# Altium PCB ice_MotherBoard.PcbDoc
Units mm, origin at the board's own origin, x right, y up, seen from the top; angles counter-clockwise.
Board outline 65.6 x 41.6 mm, 2 copper layers (Top Layer, Bottom Layer), stack 1.569 mm thick; 46 components, 33 nets, 271 pads, 43 vias.
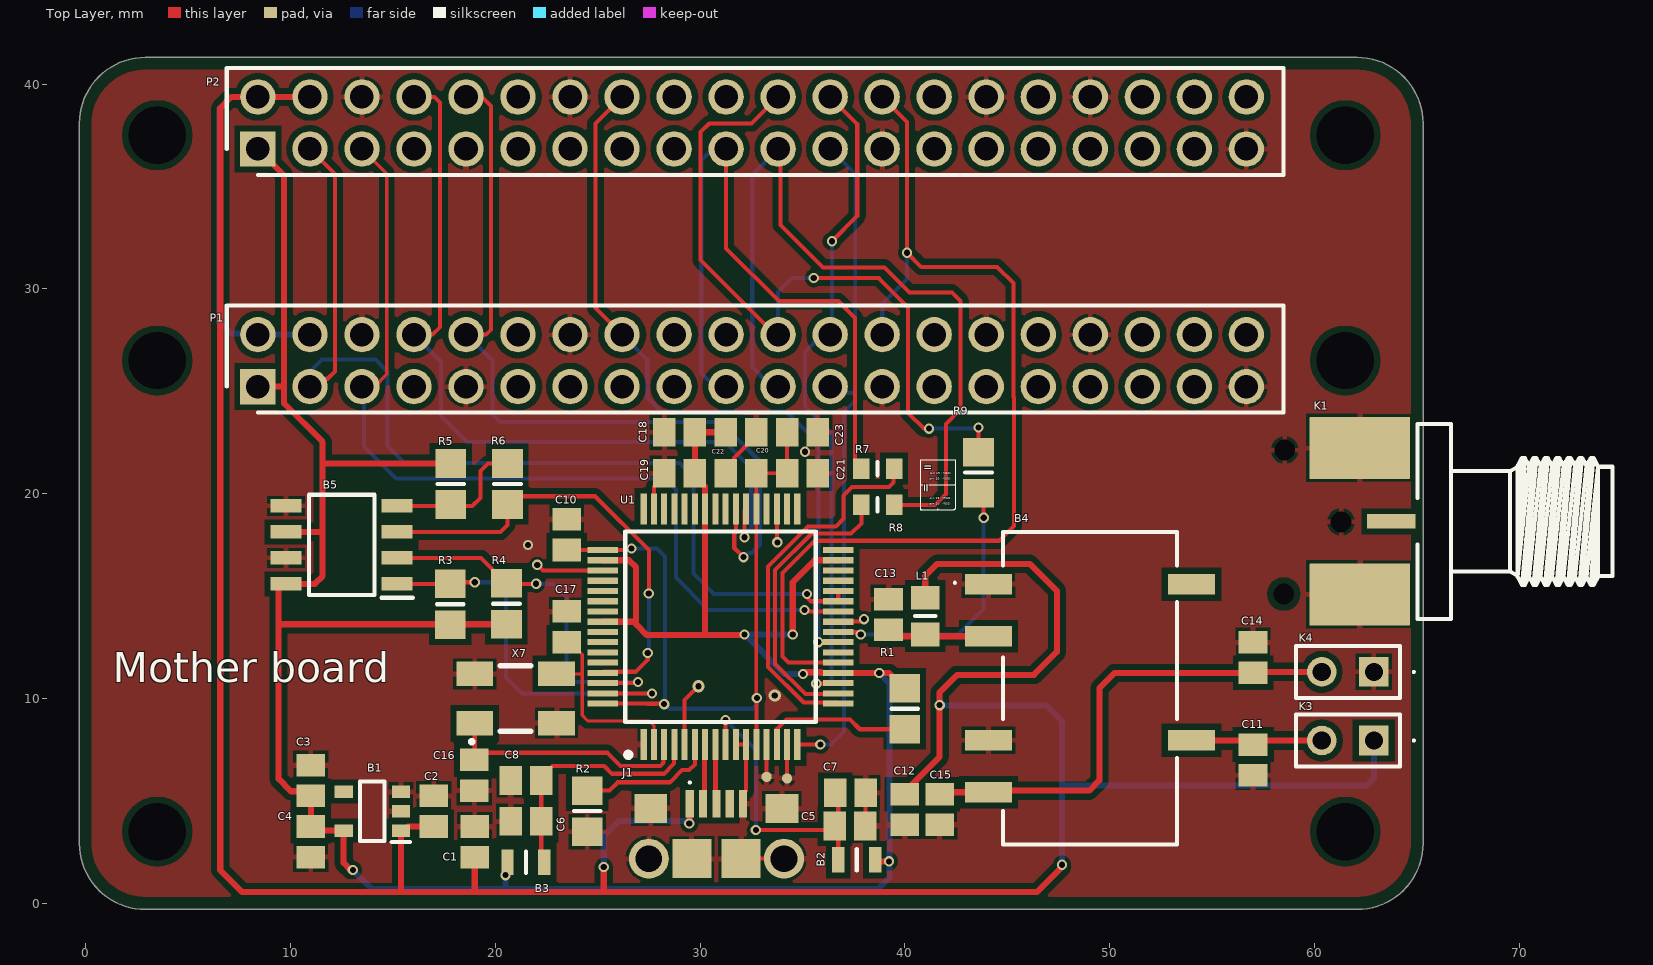
[diagram p0: Top Layer view]
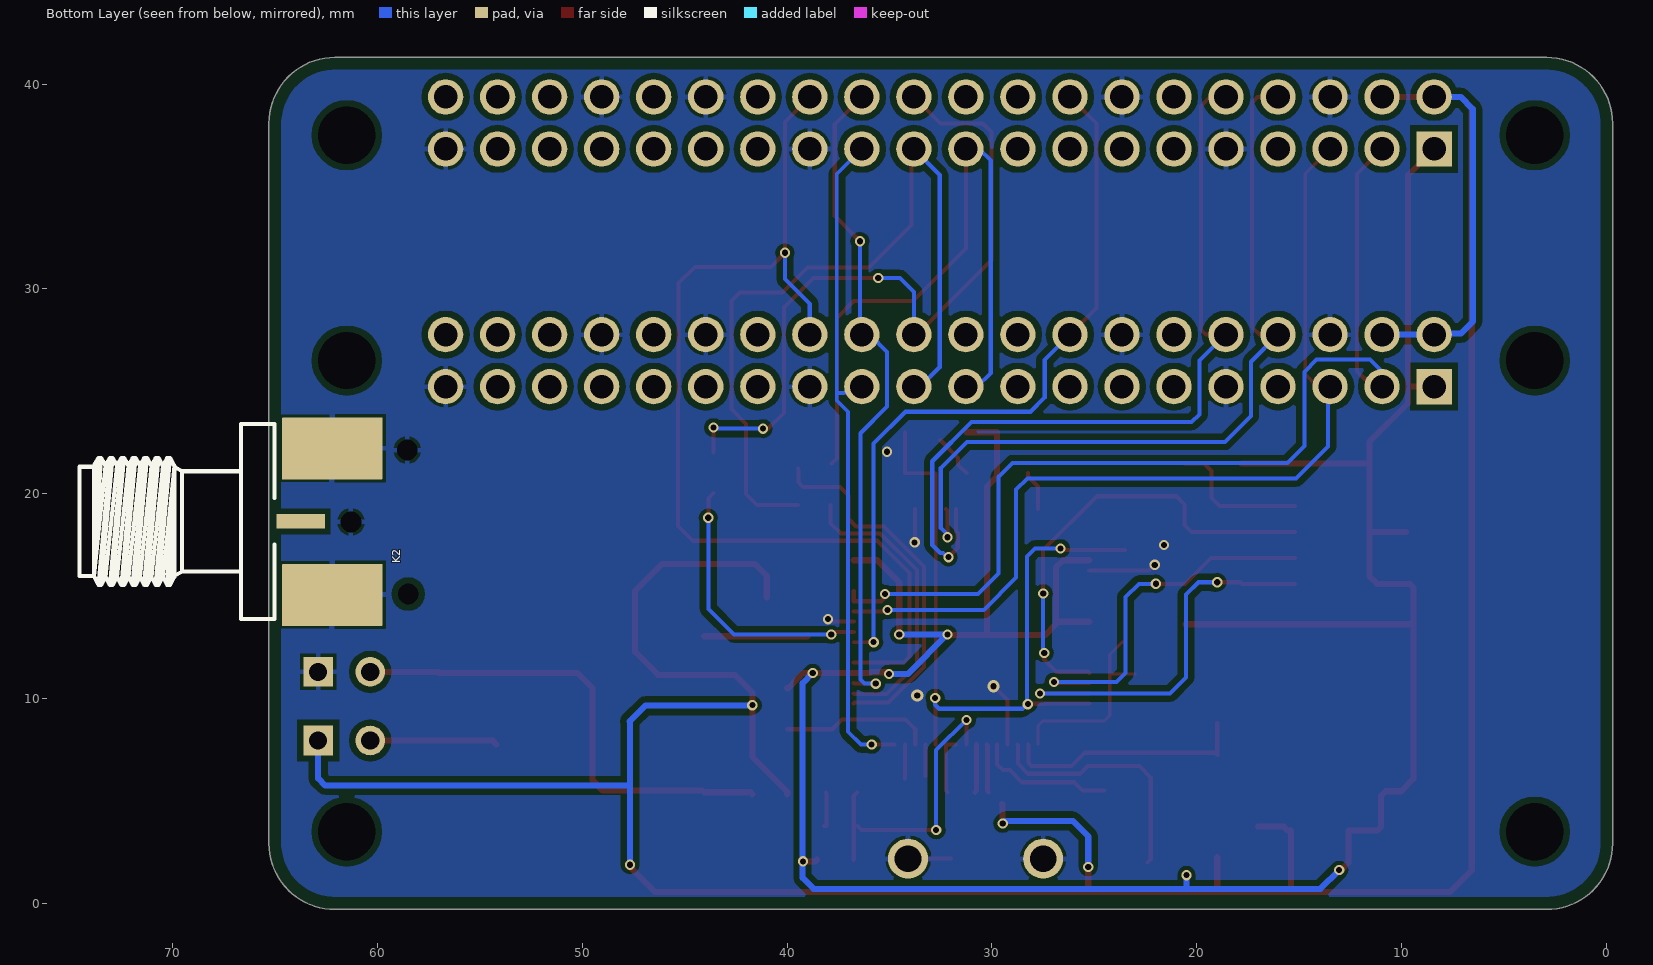
[diagram p1: Bottom Layer view, seen from below]

## Layer stack, top to bottom
Top Solder: solder mask 0.0254, SM-001, Dk 4
Top Layer: signal copper 0.035
Dielectric 1: core 1.4986, Core-043, Dk 4.3
Bottom Layer: signal copper 0.035
Bottom Solder: solder mask 0.0254, SM-001, Dk 4

## Board outline
0.644,0.644 ccw(c0.752,0.748) 0.646,0.642 ccw(c2.92,2.916) 2.92,-0.3 62.08,-0.3 ccw(c62.08,2.916) 64.354,0.642 ccw(c64.248,0.748) 64.356,0.644 ccw(c64.252,0.752) 64.358,0.646 ccw(c62.084,2.92) 65.3,2.92 65.3,38.08 ccw(c62.084,38.08) 64.358,40.354 ccw(c64.252,40.248) 64.356,40.356 ccw(c64.248,40.252) 64.354,40.358 64.358,40.354 64.354,40.358 ccw(c62.08,38.084) 62.08,41.3 2.92,41.3 ccw(c2.92,38.084) 0.646,40.358 0.642,40.354 cw(c0.748,40.248) 0.644,40.356 cw(c0.752,40.252) 0.646,40.358 0.642,40.354 ccw(c2.916,38.08) -0.3,38.08 -0.3,2.92 ccw(c2.916,2.92) 0.642,0.646 0.646,0.642 0.644,0.644 cw(c0.748,0.752)

## Design rules (kind name [scope] priority, off if disabled: settings)
BoardOutlineClearance [All] p1: gap=0.2 ignorepadtopadclearanceinfootprint=FALSE except(0.6: Poly-OutlineEdge)
Clearance Clearance_HV [InNet('+HV', '-HV')] p1: gap=0.6 ignorepadtopadclearanceinfootprint=TRUE
Clearance "Clearance Polygons" [InPolygon] p2: gap=0 ignorepadtopadclearanceinfootprint=FALSE except(0.2: Via-Fill Via-Poly Via-Region Fill-Fill Fill-Poly Fill-Region Poly-Poly Poly-Region Region-Region; 0.3: Arc-Fill Arc-Poly Arc-Region Track-Fill Track-Poly Track-Region SMDPad-Fill SMDPad-Poly SMDPad-Region THPad-Fill THPad-Poly THPad-Region)
Clearance [All] p3: gap=0.254 ignorepadtopadclearanceinfootprint=FALSE except(0.1: Arc-Text Track-Text SMDPad-Text THPad-Text Via-Text Fill-Text Poly-Text Region-Text Text-Text; 0.152: Arc-Arc Arc-Track Arc-SMDPad Arc-Via Track-Track Track-SMDPad Track-Via SMDPad-SMDPad SMDPad-Via; 0.2: Via-Fill Via-Poly Via-Region Fill-Fill Fill-Poly Fill-Region Poly-Poly Poly-Region Region-Region; 0.54: THPad-THPad)
ComponentClearance "HM-TRP & UFL" [InComponent('X1') vs InComponent('U1')] p1: gap=0 collisioncheckmode=3 verticalgap=0 showdistances=FALSE
ComponentClearance [All] p2: gap=0.025 collisioncheckmode=3 verticalgap=0.025 showdistances=FALSE
DiffPairsRouting [All] p1: maxlimit=0.254 minlimit=0.1 mostfreqgap=0.2 toplayer_minwidth=0.2 toplayer_maxwidth=0.381 toplayer_prefwidth=0.25 bottomlayer_minwidth=0.2 bottomlayer_maxwidth=0.381 bottomlayer_prefwidth=0.25 maxuncoupledlength=12.7
Height [All] p1: minheight=0 maxheight=60 prefheight=12.7
HoleSize [All] p1: absolutevalues=TRUE maxlimit=6.3 minlimit=0.2 maxpercent=80.000 minpercent=20.000
HoleToHoleClearance [All] p1: gap=0.3 allowstackedmicrovias=FALSE
MinimumAnnularRing MinimumAnnularRing_Via [IsVia] p1: minimumring=0.1
MinimumAnnularRing [All] p2: minimumring=0.1
MinimumSolderMaskSliver [All] p1: minsoldermaskwidth=0
PlaneClearance [All] p1: clearance=0.254
PlaneConnect [All] p1: planeconnectstyle=Relief reliefexpansion=0.102 reliefentries=4 reliefconductorwidth=0.152 reliefairgap=0.152
PolygonConnect "Via connect style" [isVia] p1: connectstyle=Direct reliefconductorwidth=0.254 reliefentries=4 polygonreliefangle="90 Angle" airgapwidth=0.254
PolygonConnect [All] p2: connectstyle=Relief reliefconductorwidth=0.254 reliefentries=4 polygonreliefangle="90 Angle" airgapwidth=0.152
RoutingCorners [All] p1: cornerstyle=45-Degree minsetback=1.25 maxsetback=1.25
RoutingVias [All] p1: holewidth=0.4 width=0.8 viastyle="Through Hole" minholewidth=0.2 minwidth=0.45 maxholewidth=2 maxwidth=4
SilkToSilkClearance [All] p1: silktosilkclearance=0
SilkToSolderMaskClearance [IsPad] p1: minsilkscreentomaskgap=0.1 clearancetoexposedcopper=TRUE
SolderMaskExpansion SolderMaskExpansion_Via [IsVia] p1: expansion=0.05
SolderMaskExpansion [All] p2: expansion=0.05 useseparateexpansions=TRUE expansionbottom=0.05
UnRoutedNet [All] p1: checkbadconnections=TRUE
Width 50Ohm [InNetClass('50Ohm')] p1 off: maxlimit=0.185 minlimit=0.185 preferedwidth=0.185 impedanceprofiledriven=TRUE minimp=50.000000 maximp=50.000000 favimp=50.000000
Width GND [InNet('GND')] p2: maxlimit=6.35 minlimit=0.127 preferedwidth=0.508
Width [All] p3: maxlimit=10.16 minlimit=0.152 preferedwidth=0.203
18 further rules are at their usual default settings.

## Classes and differential pairs
differential pair D: +D_P -D_N

## Components (designator, comment, footprint, x,y, rotation, side; value= is the part's Value field where it differs from the comment)
B1 "BU33SD5WG-TR" SOT95P280X125-5N_ 14,4.5 r180 top
B2 "BLM21AG102SN1D" BLM21AG102BH1J 37.65,2.125 r180 top
B3 "BLM21AG102SN1D" BLM21AG102BH1J 21.5,2 r0 top
B4 "IAS0105D24" IAS0105D15_ 49.041,10.5 r270 top
B5 "M93C46-WMN6P" SOIC127P600X175-8N 12.5,17.5 r180 top
C1 "0.1uF 10V" C0805 19,3 r270 top
C2 "1uF  6.3 VDC" C0805 17,4.5 r270 top
C3 "1uF  6.3 VDC" C0805 11,6 r270 top
C4 "0.1uF 10V" C0805 11,3 r90 top
C5 "4.7uF 25V" C0805 37.325,3.775 r180 top
C6 "4.7uF 25V" C0805 21.5,4 r0 top
C7 "0.1uF 10V" C0805 37.35,5.4 r180 top
C8 "0.1uF 10V" C0805 21.5,6 r0 top
C10 "3.3V 25V" C0805 23.5,18 r270 top
C11 "1uF 50V" C0805 57,7 r90 top
C12 "4.7uF 25V" C0805 39.998,4.575 r90 top
C13 "4.7uF 25V" C0805 39.2,14.1 r270 top
C14 "1uF 50V" C0805 57,12 r90 top
C15 "1nF 25V" C0805 41.702,4.575 r90 top
C16 "22pF 50V" C0805 18.975,6.25 r90 top
C17 "22pF 50V" C0805 23.5,13.5 r270 top
C18 "0.1uF 10V" C0805 29,23 r0 top
C19 "0.1uF 10V" C0805 29,21 r0 top
C20 "0.1uF 10V" C0805 32,23 r180 top
C21 "0.1uF 10V" C0805 35,21 r180 top
C22 "0.1uF 10V" C0805 32,21 r0 top
C23 "0.1uF 10V" C0805 35,23 r180 top
J1 "10118193-0001LF" 101181930001LF 30.8,2.25 r0 top (schematic designator J?)
K1 "SMA_Edge" AMPHENOL_132357-11_ 63.75,18.65 r180 top
K2 "SMA_Edge" AMPHENOL_132357-11_ 63.75,18.65 r180 bottom
K3 "1x2PLS" 55342061_ 62.9,7.95 r90 top
K4 "1x2PLS" 55342061_ 62.9,11.3 r90 top
L1 "6.8uH" INDC2012X110N_ 41,14.025 r270 top
P1 "2x20 2.54mm vertical" RHDR40W97P254X254_2X20_5130X508X860P_ 32.545,26.495 r0 top
P2 "2x20 2.54mm vertical" RHDR40W97P254X254_2X20_5130X508X860P_ 32.545,38.1 r0 top
R1 "1K" 6-0805_M 40,9.5 r270 top
R2 "12K" 6-0805_M 24.5,4.5 r90 top
R3 "10K" 6-0805_M 17.8,14.6 r270 top
R4 "10K" 6-0805_M 20.55,14.625 r90 top
R5 "10K" 6-0805_M 17.825,20.475 r270 top
R6 "2.2K" 6-0805_M 20.6,20.475 r270 top
R7 "0R" 0603-R 38.675,21.225 r180 top
R8 "0R" 0603-R 38.675,19.45 r0 top
R9 "2.2K" 6-0805_M 43.6,21.025 r90 top
U1 "FT4232HL-TRAY" QFP50P1200X1200X160-64N 31,13.5 r90 top
X7 "ABM3B-12.000MHZ-22-D3W-T" ABM3B 21,10 r0 top

## Footprints (in the part's own frame and the unit in brackets; to place one, negate y for a bottom-side part, rotate by r counter-clockwise, add the part's x,y. Pads: shape width x height; smd on the part's side, far side on the other; paste and mask are expansions set on the pad)
6-0805_M [mm] "Chip Resistor, Body 2.0x1.2mm, IPC Low Density"
  rect 1.4x1.5 smd: 1(-1,0) 2(1,0)
  silkscreen extent 0,-0.65 0,0.65, body extent -1.07,-0.7 1.07,0.7, height 0.7
0603-R [mm]
  rect 0.8x1 smd: 1(-0.8,0) 2(0.8,0)
  silkscreen extent 0,-0.33 0,0.33, body extent -0.77,-0.42 0.78,0.43, height 0.45
55342061_ [mm]
  rect 1.446x1.446 hole 0.89: 1(0,0)
  round 1.446 hole 0.89: 2(0,2.54)
  silkscreen extent -1.27,-2 1.27,3.81, body extent -1.27,-1.24 1.27,3.78, height 8.58
101181930001LF [mm]
  rect 0.4x1.35 smd: 1(-1.3,2.605) 2(-0.65,2.605) 3(0,2.605) 4(0.65,2.605) 5(1.3,2.605)
  round 1.95 hole 1.3: MH1(-3.3,-0.07) MH2(3.3,-0.07)
  rect 1.6x1.4 smd: MP1(-3.2,2.38) MP2(3.2,2.38)
  rect 1.9x1.9 smd: MP3(-1.2,-0.07) MP4(1.2,-0.07)
  silkscreen extent -1.35,3.6 -1.25,3.7, body extent -4.1,-2.73 3.76,2.93, height 2.81
ABM3B [mm]
  rect 1.8x1.2 smd: 1(-2,-1.2) 2(2,-1.2) 3(2,1.2) 4(-2,1.2)
  silkscreen extent -2.2,-2.16 0.75,1.6, body extent -2.5,-1.6 2.5,1.6, height 1.1
AMPHENOL_132357-11_ [mm]
  rect 2.35x0.7 smd: 1(0,0)
  rect 4.9x3 smd: 2(1.525,3.55) 2(1.525,-3.6)
  rect 4.9x3 smd far side: 2(1.55,3.575) 2(1.55,-3.575)
  silkscreen extent -10.81,-4.76 -1.28,4.76, body extent -10.8,-4.76 3.48,4.76, height 4.08
BLM21AG102BH1J [mm]
  rect 0.6x1.25 smd: 1(-0.9,0) 2(0.9,0)
  silkscreen extent 0,-0.53 0,0.53, body extent -0.98,-0.43 1.02,0.43, height 0.63
C0805 [mm] "Chip Capacitor, Body 2.0x1.3mm, IPC High Density"
  rect 1.1x1.4 smd: 1(-0.75,0) 2(0.75,0)
  body extent -1.1,-0.72 1.1,0.72, height 1.4
IAS0105D15_ [mm]
  rect 1x2.29 smd: 1(-5.08,-4.955) 2(-2.54,-4.955) 4(2.54,-4.955) 5(5.08,-4.955) 7(2.54,4.955) 10(-5.08,4.955)
  silkscreen extent -7.62,-6.65 7.62,4.25, body extent -7.62,-6 7.62,6, height 7.85
INDC2012X110N_ [mm]
  rect 1.15x1.4 smd: 1(-0.9,0) 2(0.9,0)
  silkscreen extent 0,-0.5 0,0.5, body extent -1,-0.6 1,0.6, height 1.1
QFP50P1200X1200X160-64N [mm]
  rect 1.5x0.3 smd: 1(-5.75,3.75) 2(-5.75,3.25) 3(-5.75,2.75) 4(-5.75,2.25) 5(-5.75,1.75) 6(-5.75,1.25) 7(-5.75,0.75) 8(-5.75,0.25) 9(-5.75,-0.25) 10(-5.75,-0.75) 11(-5.75,-1.25) 12(-5.75,-1.75) 13(-5.75,-2.25) 14(-5.75,-2.75) 15(-5.75,-3.25) 16(-5.75,-3.75) 33(5.75,-3.75) 34(5.75,-3.25) 35(5.75,-2.75) 36(5.75,-2.25) 37(5.75,-1.75) 38(5.75,-1.25) 39(5.75,-0.75) 40(5.75,-0.25) 41(5.75,0.25) 42(5.75,0.75) 43(5.75,1.25) 44(5.75,1.75) 45(5.75,2.25) 46(5.75,2.75) 47(5.75,3.25) 48(5.75,3.75)
  rect 0.3x1.5 smd: 17(-3.75,-5.75) 18(-3.25,-5.75) 19(-2.75,-5.75) 20(-2.25,-5.75) 21(-1.75,-5.75) 22(-1.25,-5.75) 23(-0.75,-5.75) 24(-0.25,-5.75) 25(0.25,-5.75) 26(0.75,-5.75) 27(1.25,-5.75) 28(1.75,-5.75) 29(2.25,-5.75) 30(2.75,-5.75) 31(3.25,-5.75) 32(3.75,-5.75) 49(3.75,5.75) 50(3.25,5.75) 51(2.75,5.75) 52(2.25,5.75) 53(1.75,5.75) 54(1.25,5.75) 55(0.75,5.75) 56(0.25,5.75) 57(-0.25,5.75) 58(-0.75,5.75) 59(-1.25,5.75) 60(-1.75,5.75) 61(-2.25,5.75) 62(-2.75,5.75) 63(-3.25,5.75) 64(-3.75,5.75)
  silkscreen extent -6.37,-4.65 4.65,4.65, body extent -6,-6 6,6, height 1.6
RHDR40W97P254X254_2X20_5130X508X860P_ [mm]
  rect 1.725x1.725 hole 1.15: 1(-24.13,-1.27)
  round 1.725 hole 1.15: 2(-24.13,1.27) 3(-21.59,-1.27) 4(-21.59,1.27) 5(-19.05,-1.27) 6(-19.05,1.27) 7(-16.51,-1.27) 8(-16.51,1.27) 9(-13.97,-1.27) 10(-13.97,1.27) 11(-11.43,-1.27) 12(-11.43,1.27) 13(-8.89,-1.27) 14(-8.89,1.27) 15(-6.35,-1.27) 16(-6.35,1.27) 17(-3.81,-1.27) 18(-3.81,1.27) 19(-1.27,-1.27) 20(-1.27,1.27) 21(1.27,-1.27) 22(1.27,1.27) 23(3.81,-1.27) 24(3.81,1.27) 25(6.35,-1.27) 26(6.35,1.27) 27(8.89,-1.27) 28(8.89,1.27) 29(11.43,-1.27) 30(11.43,1.27) 31(13.97,-1.27) 32(13.97,1.27) 33(16.51,-1.27) 34(16.51,1.27) 35(19.05,-1.27) 36(19.05,1.27) 37(21.59,-1.27) 38(21.59,1.27) 39(24.13,-1.27) 40(24.13,1.27)
  silkscreen extent -25.65,-2.54 25.95,2.69, body extent -25.65,-2.54 25.65,2.54, height 8.6
SOIC127P600X175-8N [mm]
  rect 1.525x0.65 smd: 1(-2.712,1.905) 2(-2.712,0.635) 3(-2.712,-0.635) 4(-2.712,-1.905) 5(2.712,-1.905) 6(2.712,-0.635) 7(2.712,0.635) 8(2.712,1.905)
  silkscreen extent -3.47,-2.45 1.6,2.58, body extent -3,-2.45 3,2.45, height 1.75
SOT95P280X125-5N_ [mm]
  rect 0.9x0.6 smd: 1(-1.4,0.95) 2(-1.4,0) 3(-1.4,-0.95) 4(1.4,-0.95) 5(1.4,0.95)
  silkscreen extent -1.85,-1.45 0.6,1.5, body extent -1.4,-1.45 1.4,1.45, height 1.25

## Part data
B1: "LDO regulator,3.3V,0.5A,standby,SSOP5 ROHM BU33SD5WG-TR, LDO Voltage Regulator, 0.5A, 3.3 V +/-2%, 1.7  6 Vin, 5-Pin SSOP", Manufacturer_Name="ROHM Semiconductor", Mouser Part Number=755-BU33SD5WG-TR, Datasheet Link=https://componentsearchengine.com/Datasheets/1/BU33SD5WG-TR.pdf, Geometry.Height=1.25mm, Manufacturer_Part_Number=BU33SD5WG-TR, Mouser Price/Stock=https://www.mouser.co.uk/ProductDetail/ROHM-Semiconductor/BU33SD5WG-TR?qs=%2FKR40Cd6GUrQDzRkUEt69Q%3D%3D
B2 B3: "BLM21_N1D Series EMI Suppression Filter 1000+/-25% at 100MHz 600mA @85", Manufacturer_Name="Murata Electronics", Mouser Part Number=81-BLM21AG102SN1, Arrow Part Number=BLM21AG102SN1D, Arrow Price/Stock=https://www.arrow.com/en/products/blm21ag102sn1d/murata-manufacturing?region=nac, Datasheet Link=https://www.murata.com/en-us/products/productdetail?partno=BLM21AG102SN1%23, Geometry.Height=1.05mm, Manufacturer_Part_Number=BLM21AG102SN1D, Mouser Price/Stock=https://www.mouser.co.uk/ProductDetail/Murata-Electronics/BLM21AG102SN1D?qs=OoMRb4U3ghiVKbYhfeUHEA%3D%3D
B4: library part IAS0105D15, "Isolated DC/DC Converters DC-DC, 1W, UNREGULATED, DUAL OUTPUT, SMD", Manufacturer_Name="XP POWER", Mouser Part Number=209-IAS0105D15, Datasheet Link=https://www.xppower.com/portals/0/pdfs/SF_IAS01.pdf, Geometry.Height=7.75mm, Manufacturer_Part_Number=IAS0105D15, Mouser Price/Stock=https://www.mouser.co.uk/ProductDetail/XP-Power/IAS0105D15?qs=Cb2nCFKsA8ol8aKojAQnyQ%3D%3D
B5: "M93C46-WMN6P, Serial EEPROM Memory 1kbit, Serial-Microwire, 200ns 2.5  5.5 V, 8-Pin", Manufacturer_Name=STMicroelectronics, Mouser Part Number=511-M93C46-WMN6P, Datasheet Link=http://www.st.com/st-web-ui/static/active/en/resource/technical/document/datasheet/CD00001142.pdf, Geometry.Height=1.75mm, Manufacturer_Part_Number=M93C46-WMN6P, Mouser Price/Stock=https://www.mouser.co.uk/ProductDetail/STMicroelectronics/M93C46-WMN6P?qs=GGwmtXQPF%2FlC4u8YDwI7hg%3D%3D
C1 C4 C7 C8 C18 C19 C20 C21 C22 C23: library part C0805C104K8RACAUTO, "SMD Auto X7R, Ceramic, 0.1 uF, 10%, 10 VDC, 25 VDC, 125C, -55C, X7R, SMD, MLCC, Temperature Stable, Automotive Grade, 5 % , 10 GOhms, 11 mg, 0805, 2mm, 1.25mm, 0.78mm, 0.75mm, 0.5mm, 4000, 78  Weeks, 80", Manufacturer_Name=KEMET, Mouser Part Number=80-C0805C104K8RAUTO, Arrow Part Number=C0805C104K8RACAUTO, Arrow Price/Stock=https://www.arrow.com/en/products/c0805c104k8racauto/kemet-corporation?region=nac, Datasheet Link=https://content.kemet.com/datasheets/KEM_C1023_X7R_AUTO_SMD.pdf, Geometry.Height=1.1mm, Manufacturer_Part_Number=C0805C104K8RACAUTO, Mouser Price/Stock=https://www.mouser.co.uk/ProductDetail/KEMET/C0805C104K8RACAUTO?qs=ds50AKTGxA8vmn6TMGYnqg%3D%3D
C2 C3: library part C0805C105K9RACTU, "SMD Comm X7R, Ceramic, 1 uF, 10%, 6.3 VDC, 15.75 VDC, 125C, -55C, X7R, SMD, MLCC, Temperature Stable, Class II, 5 % , 500 MOhms, 13 mg, 0805, 2mm, 1.25mm, 1.25mm, 0.75mm, 0.5mm, 2500, 78  Weeks, 80", Manufacturer_Name=KEMET, Mouser Part Number=80-C0805C105K9R, Arrow Part Number=C0805C105K9RACTU, Arrow Price/Stock=https://www.arrow.com/en/products/c0805c105k9ractu/kemet-corporation, Datasheet Link=https://content.kemet.com/datasheets/KEM_C1002_X7R_SMD.pdf, Geometry.Height=1.1mm, Manufacturer_Part_Number=C0805C105K9RACTU, Mouser Price/Stock=https://www.mouser.co.uk/ProductDetail/KEMET/C0805C105K9RACTU?qs=Nnkldhwoc36daYb4WU%2Fecw%3D%3D
C5 C6 C12 C13: library part C0805C475K3RACTU, "SMD Comm X7R, Ceramic, 4.7 uF, 10%, 25 VDC, 62.5 VDC, 125C, -55C, X7R, SMD, MLCC, Temperature Stable, Class II, 10 % , 21.3 MOhms, 21 mg, 0805, 2mm, 1.25mm, 1.25mm, 0.75mm, 0.5mm, 2500, 78  Weeks, 80", Manufacturer_Name=KEMET, Mouser Part Number=80-C0805C475K3RACTU, Arrow Part Number=C0805C475K3RACTU, Arrow Price/Stock=https://www.arrow.com/en/products/c0805c475k3ractu/kemet-corporation?region=nac, Datasheet Link=https://content.kemet.com/datasheets/KEM_C1002_X7R_SMD.pdf, Geometry.Height=1.1mm, Manufacturer_Part_Number=C0805C475K3RACTU, Mouser Price/Stock=https://www.mouser.co.uk/ProductDetail/KEMET/C0805C475K3RACTU?qs=PzGy0jfpSMsRb1o8vMQxfQ%3D%3D
C10: library part C2012X7R1E335K125AB, "TDK 0805 C 3.3uF Ceramic Multilayer Capacitor, 25 V dc, +125C, X7R Dielectric, +/-10%", Manufacturer_Name=TDK, Mouser Part Number=810-C2012X7R1E335K, Datasheet Link=https://product.tdk.com/system/files/dam/doc/product/capacitor/ceramic/mlcc/catalog/mlcc_commercial_general_en.pdf, Geometry.Height=0.75mm, Manufacturer_Part_Number=C2012X7R1E335K125AB, Mouser Price/Stock=https://www.mouser.co.uk/ProductDetail/TDK/C2012X7R1E335K125AB?qs=NRhsANhppD%2FtCJRQfh%252BIMA%3D%3D
C11 C14: library part C0805C105K5RACTU, "SMD Comm X7R, Ceramic, 1 uF, 10%, 50 VDC, 125 VDC, 125C, -55C, X7R, SMD, MLCC, Temperature Stable, Class II, 10 % , 100 MOhms, 21 mg, 0805, 2mm, 1.25mm, 1.25mm, 0.75mm, 0.5mm, 2500, 78  Weeks, 80", Manufacturer_Name=KEMET, Mouser Part Number=80-C0805C105K5R, Arrow Part Number=C0805C105K5RACTU, Arrow Price/Stock=https://www.arrow.com/en/products/c0805c105k5ractu/kemet-corporation?region=nac, Datasheet Link=https://content.kemet.com/datasheets/KEM_C1002_X7R_SMD.pdf, Geometry.Height=1.1mm, Manufacturer_Part_Number=C0805C105K5RACTU, Mouser Price/Stock=https://www.mouser.co.uk/ProductDetail/KEMET/C0805C105K5RACTU?qs=iP0bYSAMAFrBrUflcErrLQ%3D%3D
C15: library part C0805C102K8RACTU, "SMD Comm X7R, Ceramic, 1000 pF, 10%, 10 VDC, 25 VDC, 125C, -55C, X7R, SMD, MLCC, Temperature Stable, Class II, 5 % , 100 GOhms, 11 mg, 0805, 2mm, 1.25mm, 0.78mm, 0.75mm, 0.5mm, 4000, 78  Weeks, 80", Manufacturer_Name=KEMET, Mouser Part Number=80-C0805C102K8R, Arrow Part Number=C0805C102K8RACTU, Arrow Price/Stock=https://www.arrow.com/en/products/c0805c102k8ractu/kemet-corporation, Datasheet Link=https://content.kemet.com/datasheets/KEM_C1002_X7R_SMD.pdf, Geometry.Height=1.1mm, Manufacturer_Part_Number=C0805C102K8RACTU, Mouser Price/Stock=https://www.mouser.co.uk/ProductDetail/KEMET/C0805C102K8RACTU?qs=89eQnnNloViWkbrXkPqh5g%3D%3D
C16 C17: library part C0805C220F5GACTU, "SMD Comm C0G, Ceramic, 22 pF, 1%, 50 VDC, 125 VDC, 125C, -55C, C0G, SMD, MLCC, Ultra-Stable, Low Loss, Class I, 0.1 % , 100 GOhms, 8 mg, 0805, 2mm, 1.25mm, 0.7mm, 0.75mm, 0.5mm, 4000, 78  Weeks, 120", Manufacturer_Name=KEMET, Mouser Part Number=80-C0805C220F5G, Arrow Part Number=C0805C220F5GACTU, Arrow Price/Stock=https://www.arrow.com/en/products/c0805c220f5gactu/kemet-corporation, Datasheet Link=https://content.kemet.com/datasheets/KEM_C1003_C0G_SMD.pdf, Geometry.Height=1.1mm, Manufacturer_Part_Number=C0805C220F5GACTU, Mouser Price/Stock=https://www.mouser.co.uk/ProductDetail/KEMET/C0805C220F5GACTU/?qs=RXK%252BYb%252BisXRjMukjg6azjA%3D%3D
J1: "Connector", Manufacturer_Name="Amphenol Communications Solutions", Mouser Part Number=649-10118193-0001LF, Arrow Part Number=10118193-0001LF, Arrow Price/Stock=https://www.arrow.com/en/products/10118193-0001lf/amphenol-fci?region=nac, Datasheet Link=https://cdn.amphenol-icc.com/media/wysiwyg/files/drawing/10118193.pdf, Height=3.3mm, Manufacturer_Part_Number=10118193-0001LF, Mouser Price/Stock=https://www.mouser.co.uk/ProductDetail/Amphenol-FCI/10118193-0001LF?qs=Ywefl8B65e63Nsqd%252B8HZaQ%3D%3D
L1: library part PE-0805CLH6R8STS, "Fixed Inductors 0805 6.8uH 600mA DCR=420mOhms RF", Manufacturer_Name=Pulse, Mouser Part Number=673-PE-0805CLH6R8STS, Datasheet Link=https://www.mouser.com/datasheet/2/336/PLEI_S_A0011079421_1-2514267.pdf, Geometry.Height=1.1mm, Manufacturer_Part_Number=PE-0805CLH6R8STS, Mouser Price/Stock=https://www.mouser.co.uk/ProductDetail/Pulse-Electronics/PE-0805CLH6R8STS?qs=P1JMDcb91o4zi65tQL%252BIoA%3D%3D
P1 P2: "SSQ-110-02-G-D-RA", LatestRevisionDate=17-Jul-2002, LatestRevisionNote="Re-released for DXP Platform.", Publisher="Altium Limited"
R1: library part ERJ-6GEYJ102V, "RESISTOR, 0805 1K Ohm +/-5% 0.125 W", Manufacturer_Name=Panasonic, Mouser Part Number=667-ERJ-6GEYJ102V, Arrow Part Number=ERJ-6GEYJ102V, Arrow Price/Stock=https://www.arrow.com/en/products/erj-6geyj102v/panasonic?region=europe, Manufacturer_Part_Number=ERJ-6GEYJ102V, Mouser Price/Stock=https://www.mouser.co.uk/ProductDetail/Panasonic/ERJ-6GEYJ102V?qs=tQNqqtTOejLZQ8YYVXgJXw%3D%3D
R2: library part ERJ-P06F1202V, "Thick Film Resistors - SMD 0805 12Kohms 0.5W 1% AEC-Q200", Manufacturer_Name=Panasonic, Mouser Part Number=667-ERJ-P06F1202V, Arrow Part Number=ERJ-P06F1202V, Arrow Price/Stock=https://www.arrow.com/en/products/erj-p06f1202v/panasonic, Datasheet Link=https://industrial.panasonic.com/cdbs/www-data/pdf/RDO0000/AOA0000C331.pdf, Geometry.Height=0.7mm, Manufacturer_Part_Number=ERJ-P06F1202V, Mouser Price/Stock=https://www.mouser.com/Search/Refine.aspx?Keyword=667-ERJ-P06F1202V
R3 R4 R5: library part RC0805DR-072K2L, "Resistor - SMD 10 kOhms 0805", Manufacturer_Name=YAGEO, Mouser Part Number=603-RC0805DR-072K2L, Datasheet Link=https://www.yageo.com/upload/media/product/productsearch/datasheet/rchip/PYu-RC_Group_51_RoHS_L_11.pdf, Geometry.Height=0.6mm, Manufacturer_Part_Number=RC0805DR-072K2L, Mouser Price/Stock=https://www.mouser.co.uk/ProductDetail/YAGEO/RC0805DR-072K2L?qs=9h0bZHM%2F3zISsQK01v%2Fg%2FQ%3D%3D
R6 R9: library part ERJ-P06F1202V, "Thick Film Resistors - SMD 2.2 kOhms 125 mW 0805 1%", Manufacturer_Name=Panasonic, Mouser Part Number=667-ERJ-P06F1202V, Arrow Part Number=ERJ-P06F1202V, Arrow Price/Stock=https://www.arrow.com/en/products/erj-p06f1202v/panasonic, Datasheet Link=https://industrial.panasonic.com/cdbs/www-data/pdf/RDO0000/AOA0000C331.pdf, Geometry.Height=0.7mm, Manufacturer_Part_Number=ERJ-P06F1202V, Mouser Price/Stock=https://www.mouser.com/Search/Refine.aspx?Keyword=667-ERJ-P06F1202V
R7 R8: library part ERJ-6GEYJ102V, "RESISTOR, 0805 0R", Manufacturer_Name=Panasonic, Mouser Part Number=667-ERJ-6GEYJ102V, Arrow Part Number=ERJ-6GEYJ102V, Arrow Price/Stock=https://www.arrow.com/en/products/erj-6geyj102v/panasonic?region=europe, Manufacturer_Part_Number=ERJ-6GEYJ102V, Mouser Price/Stock=https://www.mouser.co.uk/ProductDetail/Panasonic/ERJ-6GEYJ102V?qs=tQNqqtTOejLZQ8YYVXgJXw%3D%3D
U1: "IC USB HS QUAD UART/SYNC 64-LQFP", Manufacturer_Name="FTDI Chip", Mouser Part Number=895-FT4232HL-TRAY, Arrow Part Number=FT4232HL-TRAY, Arrow Price/Stock=https://www.arrow.com/en/products/ft4232hl-tray/ftdi-chip, Datasheet Link=https://www.ftdichip.com/Support/Documents/DataSheets/ICs/DS_FT4232H.pdf, Geometry.Height=1.6mm, Manufacturer_Part_Number=FT4232HL-TRAY, Mouser Price/Stock=https://www.mouser.co.uk/ProductDetail/FTDI/FT4232HL-TRAY?qs=LsYZF85lA7ZOH9FvmmPH7w%3D%3D
X7: "Crystals 12MHz 22pF 25ppm -40C +85C", Manufacturer_Name=ABRACON, Mouser Part Number=815-ABM3B-12-22-D3WT, Datasheet Link=https://abracon.com/Resonators/abm3b.pdf, Manufacturer_Part_Number=ABM3B-12.000MHZ-22-D3W-T, Mouser Price/Stock=https://www.mouser.co.uk/ProductDetail/ABRACON/ABM3B-12000MHZ-22-D3W-T?qs=mdWnPU%2FGekgGoMnpT5iuLA%3D%3D

## Free pads (board coordinates)
  round 0 hole 2.8 unplated mask+1.8: 0(3.5,3.5) 0(3.5,37.5) 0(3.5,26.5) 0(61.5,3.5) 0(61.5,37.5) 0(61.5,26.5)
  round 0 hole 1.02 unplated mask+1: 0(58.5,15.1) 0(58.55,22.125) 0(61.3,18.625)
  round 0.5 smd: 2(33.25,6.175) 2(34.25,6.1)

## Via types
v1: diameter 0.5, hole 0.3, Top Layer to Bottom Layer, 41 vias
v2: diameter 0.6, hole 0.3, Top Layer to Bottom Layer, 2 vias

## Nets (pads, with @x,y where several pads share a name; then routed paths per layer and width w, separated by ;. In a path a pad name is that pad's centre, name@x,y a point inside that pad or via, vN(x,y) a via of type N, cw(c..) or ccw(c..) an arc to the next point about the centre after c; other vN are vias at no path point)
1.8V: C10.2 C21.2 C22.2 C23.2 U1.12 U1.37 U1.49 U1.64 | length 37
  Top Layer w0.185: v1(32.775,10.025) 32.75,10.05 32.75,16 U1.37 C22.2 C21.2 C23.2
  Top Layer w0.2: C10.2 U1.49 26.575,17.25 v1(26.65,17.325) ; U1.64 27.437,9.75 27.441,9.746 27.859,9.746 27.863,9.75 28.225,9.75 v1(28.25,9.725) ; U1.12 32.75,10 v1(32.775,10.025)
  Bottom Layer w0.2: v1(26.65,17.325) 27.9,17.325 28.3,16.925 v1@28.3,9.725 ; v1(28.25,9.725) 28.292,9.725 28.517,9.5 32.58,9.5 32.775,9.695 v1(32.775,10.025)
BT_TRIG: P1.8 P2.8 U1.38 | length 39.4
  Top Layer w0.185: P1.8 16.94,27.765 17.3,28.125 17.3,39.1 17.03,39.37 P2.8
  Top Layer w0.2: v1(32.175,17.875) 32.175,19.175 U1.38
  Bottom Layer w0.2: P1.8 17.358,26.441 17.358,23.791 18.625,22.525 31.225,22.525 32.5,21.25 32.5,18.325 32.175,18 v1(32.175,17.875)
BT_USER: P1.10 P2.10 U1.39 | length 39.8
  Top Layer w0.185: P1.10 19.565,27.765 19.8,28 19.8,38.925 19.355,39.37 P2.10
  Top Layer w0.2: U1.39 31.75,18.163 31.671,18.084 31.671,17.354 v1(32.125,16.9)
  Bottom Layer w0.2: P1.10 18.61,27.765 19.875,26.5 19.875,23.875 20.25,23.5 31,23.5 32.917,21.583 32.917,17.492 32.526,17.101 32.392,17.101 32.191,16.9 v1(32.125,16.9)
D_N: J1.2 U1.7 | length 2.4
  Top Layer w0.23: J1.2@30.175,5.425 30.215,5.465 30.215,7.715 U1.7
D_P: J1.3 U1.8 | length 2.4
  Top Layer w0.25: U1.8@30.752,7.748 U1.8 30.75,5.5 J1.3@30.825,5.425
DONE: P1.16 P2.16 U1.23 | length 36.4
  Top Layer w0.185: v1@35.7,12.75 U1.23
  Top Layer w0.2: P1.16 24.9,29.06 24.9,38.075 P2.16 ; v1@35.701,12.751 v1(35.777,12.751)
  Bottom Layer w0.2: P1.16 27.435,26.525 27.425,26.515 27.425,24.7 28.125,24 34.227,24 35.777,22.45 v1(35.777,12.751)
F_CS: P1.26 P2.26 U1.21 | length 49.5
  Top Layer w0.2: U1.21 35.45,11.75 34.325,11.75 34.021,12.054 34.021,16.121 35.6,17.7 44.6,17.7 45.327,18.427 45.327,24.692 45.298,24.721 45.298,30.277 44.5,31.075 40.8,31.075 v1(40.111,31.764) 40.111,38.154 P2.26 ; P1.26 P1.26@38.955,27.825
  Bottom Layer w0.2: P1.26 38.895,29.27 40.111,30.486 v1(40.111,31.764)
F_MISO: P1.21 P2.21 R8.2 | length 40
  Top Layer w0.185: P1.21 P1.21@33.875,25.225
  Top Layer w0.2: P1.21 P1.21@33.89,25.15 ; P2.21 33.925,36.72 33.925,33.125 36,31.05 39,31.05 40.218,29.831 42.293,29.831 42.725,29.4 42.725,24.125 42,23.4 42,19.975 41.475,19.45 39.825,19.45 R8.2
  Bottom Layer w0.2: P2.21 32.55,35.565 32.55,26.175 33.5,25.225 P1.21 P1.21@34.095,25.505
F_MOSI: P1.19 P2.19 R7.2 | length 33.5
  Top Layer w0.2: P2.19@31.557,36.548 P2.19 31.275,31.975 33.85,29.4 36.748,29.4 37.571,28.577 37.571,21.728 R7.2@37.825,21.475
  Bottom Layer w0.2: P1.19 30.725,25.225 30.058,25.892 30.058,36.258 30.63,36.83 P2.19
F_SCLK: P1.23 P2.23 U1.16 | length 33.5
  Top Layer w0.185: U1.16 v1(35.875,7.75)
  Bottom Layer w0.185: v1(35.875,7.75) 36.4,7.75 37.025,8.375 37.025,24 37.575,24.55 37.575,24.922 ; P1.23@36.355,24.827 P1.23 36.65,24.93 37.225,24.93 37.233,24.922 37.575,24.922 ; P2.23 37.575,35.61 37.575,24.922
GND: B1.2 B1.3 B4.1 B4.4 B5.5 B5.7 C1.1 C2.1 C3.1 C4.1 C5.1 C6.1 C7.1 C8.1 C10.1 C11.1 C12.1 C13.1 C14.2 C15.1 C16.1 C17.1 C18.1 C19.1 C20.1 C21.1 C22.1 C23.1 J1.5 J1.MH1 J1.MH2 J1.MP1 J1.MP2 J1.MP3 J1.MP4 K1.2 K2.2 K4.1 P1.6 P1.9 P1.14 P1.25 P1.30 P1.34 P1.39 P2.6 P2.9 P2.14 P2.25 P2.30 P2.34 P2.39 pad.0@58.55,22.125 pad.0@61.3,18.625 pad.2 R2.1 U1.1 U1.5 U1.10 U1.11 U1.13 U1.15 U1.25 U1.35 U1.47 U1.51 X7.2 X7.4 | length 23.4
  Top Layer w0.2: v1(22.05,16.525) 22.325,16.25 U1.51 ; U1.47 27.75,20.35 28.25,20.85 C19.1 ; U1.5 29.25,9.925 v2(29.925,10.6) ; C22.1 31.65,21.4 31.65,21.75 C20.1@32.525,22.625 ; U1.10 U1.11 32.25,5.5 J1.5@32.175,5.425 ; J1.MP4 J1.MH2 ; pad.2@33.25,6.225 U1.13 ; U1.35 33.75,17.65 v1(33.775,17.625) ; pad.2@34.25,6.1 U1.15 ; U1.25 37.875,13.75 v1(38,13.875) ; C7.1 38.075,5.375 C5.1 C5.1@38.202,3.775
  other v1: 21.6,17.5 35.125,22.05
  other v2: 33.65,10.15
ICE_CS: P1.24 P2.24 U1.19 | length 32.7
  Top Layer w0.2: v1(35.675,10.725) 36.725,10.725 U1.19 ; P2.24 37.675,38.05 37.675,33.55 v1(36.45,32.325)
  Bottom Layer w0.2: v1(35.675,10.725) 36.225,10.725 36.425,10.925 36.425,22.95 35.125,24.25 35.125,26.925 35.965,27.765 P1.24 36.45,27.86 v1(36.45,32.325)
NetB2_2: B2.2 C5.2 C7.2 U1.9 | length 14.5
  Top Layer w0.2: U1.9 v1(31.25,8.95) ; v1(32.725,3.575) 36.375,3.575 C5.2 ; C7.2 36.75,5.25 B2.2
  Bottom Layer w0.2: v1(31.25,8.95) 32.725,7.475 v1(32.725,3.575)
NetB3_2: B3.2 C6.2 C8.2 U1.4 | length 12.2
  Top Layer w0.2: B3.2 22.25,2.15 C6.2 C8.2 22.25,6.15 22.8,6.7 25.325,6.7 25.7,6.325 28.233,6.325 28.725,6.817 28.725,7.725 U1.4
NetB4_2: B4.2 C13.2 L1.2 | length 5.1
  Top Layer w0.3: C13.2@38.975,13.075 39.01,13.04 40.975,13.04 B4.2@44.045,13.04
NetB4_5: B4.5 C14.1 C15.2 K4.2 | length 24.1
  Top Layer w0.2: B4.5 B4.5@44.166,5.5 ; K4.2@60.122,11.062 K4.2
  Top Layer w0.3: C15.2 41.797,5.42 B4.5@44.045,5.42 ; B4.5@44.125,5.5 49,5.5 49.5,6 49.5,10.5 50.25,11.25 C14.1 57.05,11.3 K4.2
NetB4_7: B4.7 C11.2 K3.2 | length 6.3
  Top Layer w0.3: B4.7@54.206,7.75 B4.7@54.406,7.95 ; B4.7@54.365,7.95 57,7.95 K3.2
NetB5_1: B5.1 R3.1 U1.63 | length 19.7
  Top Layer w0.2: B5.1 17.795,15.595 R3.1 17.875,15.675 v1(19,15.675) ; U1.63 v1(27.65,10.25)
  Bottom Layer w0.2: v1@19.175,15.625 19.05,15.625 v1(19,15.675) 19.925,15.675 20.525,15.075 20.525,11.025 21.3,10.25 v1(27.65,10.25)
NetB5_2: B5.2 R4.2 U1.62 | length 18.2
  Top Layer w0.2: B5.2 19.31,16.865 R4.2 20.575,15.6 v1(22,15.6) ; U1.62 26.925,10.75 v1(26.975,10.8)
  Bottom Layer w0.2: v1(22,15.6) 22.825,15.6 23.475,14.95 23.475,11.25 23.925,10.8 v1(26.975,10.8)
NetB5_3: B5.3 R6.2 U1.61 | length 22.5
  Top Layer w0.2: B5.3 20.26,18.135 20.6,18.475 R6.2 21,19.875 24.875,19.875 27.5,17.25 v1(27.5,15.125) ; U1.61 25.304,11.304 26.854,11.304 27.45,11.9 v1(27.45,12.225)
  Bottom Layer w0.2: v1(27.45,12.225) 27.5,12.275 v1(27.5,15.125)
NetB5_4: B5.4 R5.2 R6.1 | length 7
  Top Layer w0.2: B5.4 18.88,19.405 19.275,19.8 19.275,21.1 19.65,21.475 R6.1
NetC16_2: C16.2 U1.3 X7.1 | length 12
  Top Layer w0.2: X7.1 19,7.35 19,7.25 19.1,7.35 25.475,7.35 26.125,6.7 28.061,6.7 28.225,6.865 28.225,7.725 U1.3
NetC17_2: C17.2 U1.2 X7.3 | length 9.9
  Top Layer w0.152: X7.3 24.225,11.2 24.25,11.175 ; C17.2 23.65,12.75 24.25,12.15 24.25,11.175 ; U1.2 27.75,8.675 27.525,8.9 24.525,8.9 24.25,9.175 24.25,11.175
NetR1_2: R1.2 U1.14 | length 7.4
  Top Layer w0.203: U1.14 33.75,8.509 34.216,8.975 37.325,8.975 37.8,8.5 R1.2
NetR2_2: R2.2 U1.6 | length 6.7
  Top Layer w0.2: R2.2 25.575,5.5 25.984,5.909 28.534,5.909 29.125,6.5 29.468,6.5 29.75,6.782 U1.6
NetR7_1: R7.1 U1.17 | length 18.3
  Top Layer w0.2: U1.17 36.7,9.8 35.064,9.8 33.317,11.547 33.317,16.454 35.267,18.404 36.629,18.404 37,18.775 37,19.9 37.425,20.325 39.225,20.325 39.442,20.542 39.442,21.192 R7.1
NetR8_1: R8.1 U1.18 | length 14.3
  Top Layer w0.2: U1.18 36.721,10.221 35.141,10.221 33.669,11.693 33.669,16.267 35.454,18.052 37.377,18.052 37.875,18.55 R8.1
NetR9_1: R9.1 U1.24 | length 13.4
  Top Layer w0.2: U1.24 37.733,13.25 37.85,13.133 v1(37.85,13.121) ; R9.1 43.85,19.775 v1(43.85,18.825)
  Bottom Layer w0.2: v1(37.85,13.121) 42.596,13.121 43.85,14.375 v1(43.85,18.825)
RESET: P1.22 P2.22 R9.2 | length 35.5
  Top Layer w0.2: P1.22 33.66,27.765 30.025,31.4 30.025,37.65 30.45,38.075 32.52,38.075 P2.22 ; v1(35.55,30.525) 38.725,30.525 40.15,29.1 40.15,23.95 40.925,23.175 v1(41.175,23.175) ; R9.2 v1(43.6,23.225)
  Bottom Layer w0.2: P1.22 33.815,29.84 34.5,30.525 v1(35.55,30.525) ; v1(41.175,23.175) 43.55,23.175 v1(43.6,23.225)
SCL: P1.5 P2.5 U1.26 | length 44.9
  Top Layer w0.185: P1.5 14.1,25.225 14.704,25.829 14.704,35.621 P2.5
  Top Layer w0.2: v1(35.1,14.325) 35.175,14.25 U1.26
  Bottom Layer w0.2: P1.5 13.6,25.12 13.6,22.3 15.15,20.75 28.275,20.75 28.825,20.2 28.825,15.9 30.4,14.325 v1(35.1,14.325)
SDA: P1.3 P2.3 U1.27 U1.28 | length 50
  Top Layer w0.2: P1.3 11.368,25.225 11.755,25.612 11.812,25.612 12.171,25.971 12.171,35.614 P2.3 ; v1(35.227,15.101) 35.227,14.923 35.4,14.75 U1.27 U1.28
  Bottom Layer w0.2: P1.3 10.955,25.955 11.548,26.548 14.152,26.548 14.75,25.95 14.75,22.325 15.575,21.5 29,21.5 29.675,20.825 29.675,16.1 30.675,15.1 v1(35.227,15.101)
VCC: B1.5 B2.1 B3.1 B5.6 B5.8 C3.2 C4.2 C18.2 C19.2 C20.2 P1.1 P2.1 R1.1 R3.2 R4.1 R5.1 U1.20 U1.31 U1.42 U1.50 U1.56 | length 140.1
  Top Layer w0.3: P2.1@8.263,36.678 P2.1 9.688,35.556 9.688,25.175 ; P1.1 9.638,25.225 9.688,25.175 ; B5.6 11.54,18.135 11.575,18.1 ; v1(13.05,1.625) 12.95,1.625 12.6,1.975 B1.5 11.2,3.55 C4.2 C3.2 10.776,5.474 10.026,5.474 9.425,6.075 9.425,13.65 ; R5.1 11.575,21.475 ; R4.1 9.45,13.625 9.425,13.65 ; U1.56 26.775,13.75 ; U1.50 26.525,16.75 26.875,16.4 26.875,13.625 27.4,13.1 30.275,13.1 ; C20.2 C18.2 C19.2 29.75,20.85 30.25,20.35 U1.42 30.25,13.125 30.275,13.1 ; v1(32.175,13.125) 32.15,13.1 30.275,13.1 ; v1@34.525,13.071 34.525,15.675 35.6,16.75 U1.31 ; v1(35.025,11.2) 35.079,11.2 35.158,11.279 35.904,11.279 35.933,11.25 v1(38.75,11.25) 39.224,11.25 39.4,11.074 39.4,11.05 39.95,10.5 R1.1 ; B2.1 38.625,2.05 v1(39.225,2.05) ; 9.425,13.65 9.425,15.42 9.6,15.595 B5.8 11.195,15.595 11.575,15.975 11.575,18.1 ; 9.688,25.175 9.688,24.412 11.575,22.525 11.575,21.475 ; 11.575,18.1 11.575,21.475
  Bottom Layer w0.3: v1(13.05,1.625) 13.975,0.7 20.525,0.7 ; v1(20.5,1.375) 20.5,0.725 20.525,0.7 ; v1(34.525,13.125) v1(32.175,13.125) 34.1,11.2 v1(35.025,11.2) ; v1(38.75,11.25) 39.25,10.75 39.25,1.25 38.7,0.7 20.525,0.7
VUSB: B1.1 C1.2 C2.2 C12.2 J1.1 K3.1 L1.1 P1.2 P1.4 P2.2 P2.4 | length 169.8
  Top Layer w0.3: P2.4 P2.2 7.12,39.37 6.575,38.825 6.575,1.625 7.65,0.55 15.4,0.55 ; C2.2 15.75,3.75 15.55,3.55 B1.1 15.4,0.55 ; C1.2 19,0.55 ; v1(25.3,1.775) 25.3,0.55 ; v1(29.475,3.9) 29.488,3.912 29.488,4.843 J1.1 ; C12.2 39.998,5.448 41.7,7.15 v1(41.7,9.675) 41.7,10.3 42.55,11.15 46.3,11.15 47.425,12.275 47.425,15.25 46.1,16.575 41.575,16.575 41,16 L1.1 ; v1@47.675,1.775 46.45,0.55 29.55,0.55 25.3,0.55 ; 15.4,0.55 19,0.55 ; 19,0.55 25.3,0.55
  Bottom Layer w0.3: P2.2 7.12,39.37 6.525,38.775 6.525,28.4 7.1,27.825 8.355,27.825 P1.2 P1.4 ; v1(25.3,1.775) 25.3,3.271 26.054,4.025 29.35,4.025 v1(29.475,3.9) ; v1(41.7,9.675) 41.725,9.65 46.925,9.65 47.7,8.875 47.675,8.85 47.675,5.85 ; v1(47.675,1.88) 47.675,5.85 ; K3.1 62.9,6.1 62.55,5.75 47.775,5.75 47.675,5.85
pads on no net: B1.4 B4.10 J1.4 K1.1 K2.1 P1.7 P1.11 P1.12 P1.13 P1.15 P1.17 P1.18 P1.20 P1.27 P1.28 P1.29 P1.31 P1.32 P1.33 P1.35 P1.36 P1.37 P1.38 P1.40 P2.7 P2.11 P2.12 P2.13 P2.15 P2.17 P2.18 P2.20 P2.27 P2.28 P2.29 P2.31 P2.32 P2.33 P2.35 P2.36 P2.37 P2.38 P2.40 U1.22 U1.29 U1.30 U1.32 U1.33 U1.34 U1.36 U1.40 U1.41 U1.43 U1.44 U1.45 U1.46 U1.48 U1.52 U1.53 U1.54 U1.55 U1.57 U1.58 U1.59 U1.60

## Polygon pours and split planes (outlines as drawn)
GND on Top Layer "GND_L01_P000" (solid, remove dead copper, pour order 0): 0.1,39.3 1.65,40.85 63.35,40.85 64.7,39.5 64.7,1.475 63.3,0.075 1.425,0.075 0.1,1.4
GND on Bottom Layer "GND_L02_P002" (solid, remove dead copper, pour order 2): 0.15,39.35 1.525,40.725 63.475,40.725 64.689,39.511 64.689,1.464 63.325,0.1 1.393,0.1 0.15,1.357

## Silkscreen, mask and mechanical layers (free items; w line width, h text height)
Top Overlay:
  lines w0.05: 40.775,20.425 42.342,20.425 ccw(c42.342,20.613) 42.475,20.48 ; 41.613,19.225 ccw(c41.582,19.255) 41.625,19.255 ; 40.775,19.2 cw(c40.835,19.14) 40.835,19.225 42.39,19.225 ccw(c42.39,19.31) 42.45,19.25 ccw(c42.39,19.31) 42.475,19.31 42.475,21.65 40.775,21.65 40.775,19.2
  text "=" at 40.9,21.1 h0.4
  text "pin 19 : MOSI" at 41.25,20.95 h0.1
  text "pin 20 : MISO" at 41.225,20.675 h0.1
  text "=" at 41.225,20.05 h0.4 r90
  text "pin 19 : MISO" at 41.225,19.725 h0.1
  text "pin 20 : MOSI" at 41.225,19.45 h0.1
  text "Mother board" at 1.325,10.3 h2.5
M2_BoardOutline:
  lines w0.3: 3,-0.15 2.92,-0.15 ; 2.92,-0.15 cw(c2.92,2.916) 0.752,0.748 0.748,0.752 cw(c2.916,2.92) -0.15,2.92 -0.15,38.08 cw(c2.916,38.08) 0.748,40.248 0.752,40.252 cw(c2.92,38.084) 2.92,41.15 62.08,41.15 cw(c62.08,38.084) 64.248,40.252 64.252,40.248 cw(c62.084,38.08) 65.15,38.08 65.15,2.92 cw(c62.084,2.92) 64.252,0.752 64.248,0.748 cw(c62.08,2.916) 62.08,-0.15 2.92,-0.15